# Altium PCB PCB2.PcbDoc
Units mil, origin at the board's own origin, x right, y up, seen from the top; angles counter-clockwise.
Board outline 3440 x 2640 mil, 2 copper layers (Top Layer, Bottom Layer); 109 components, 52 nets, 286 pads, 27 vias.
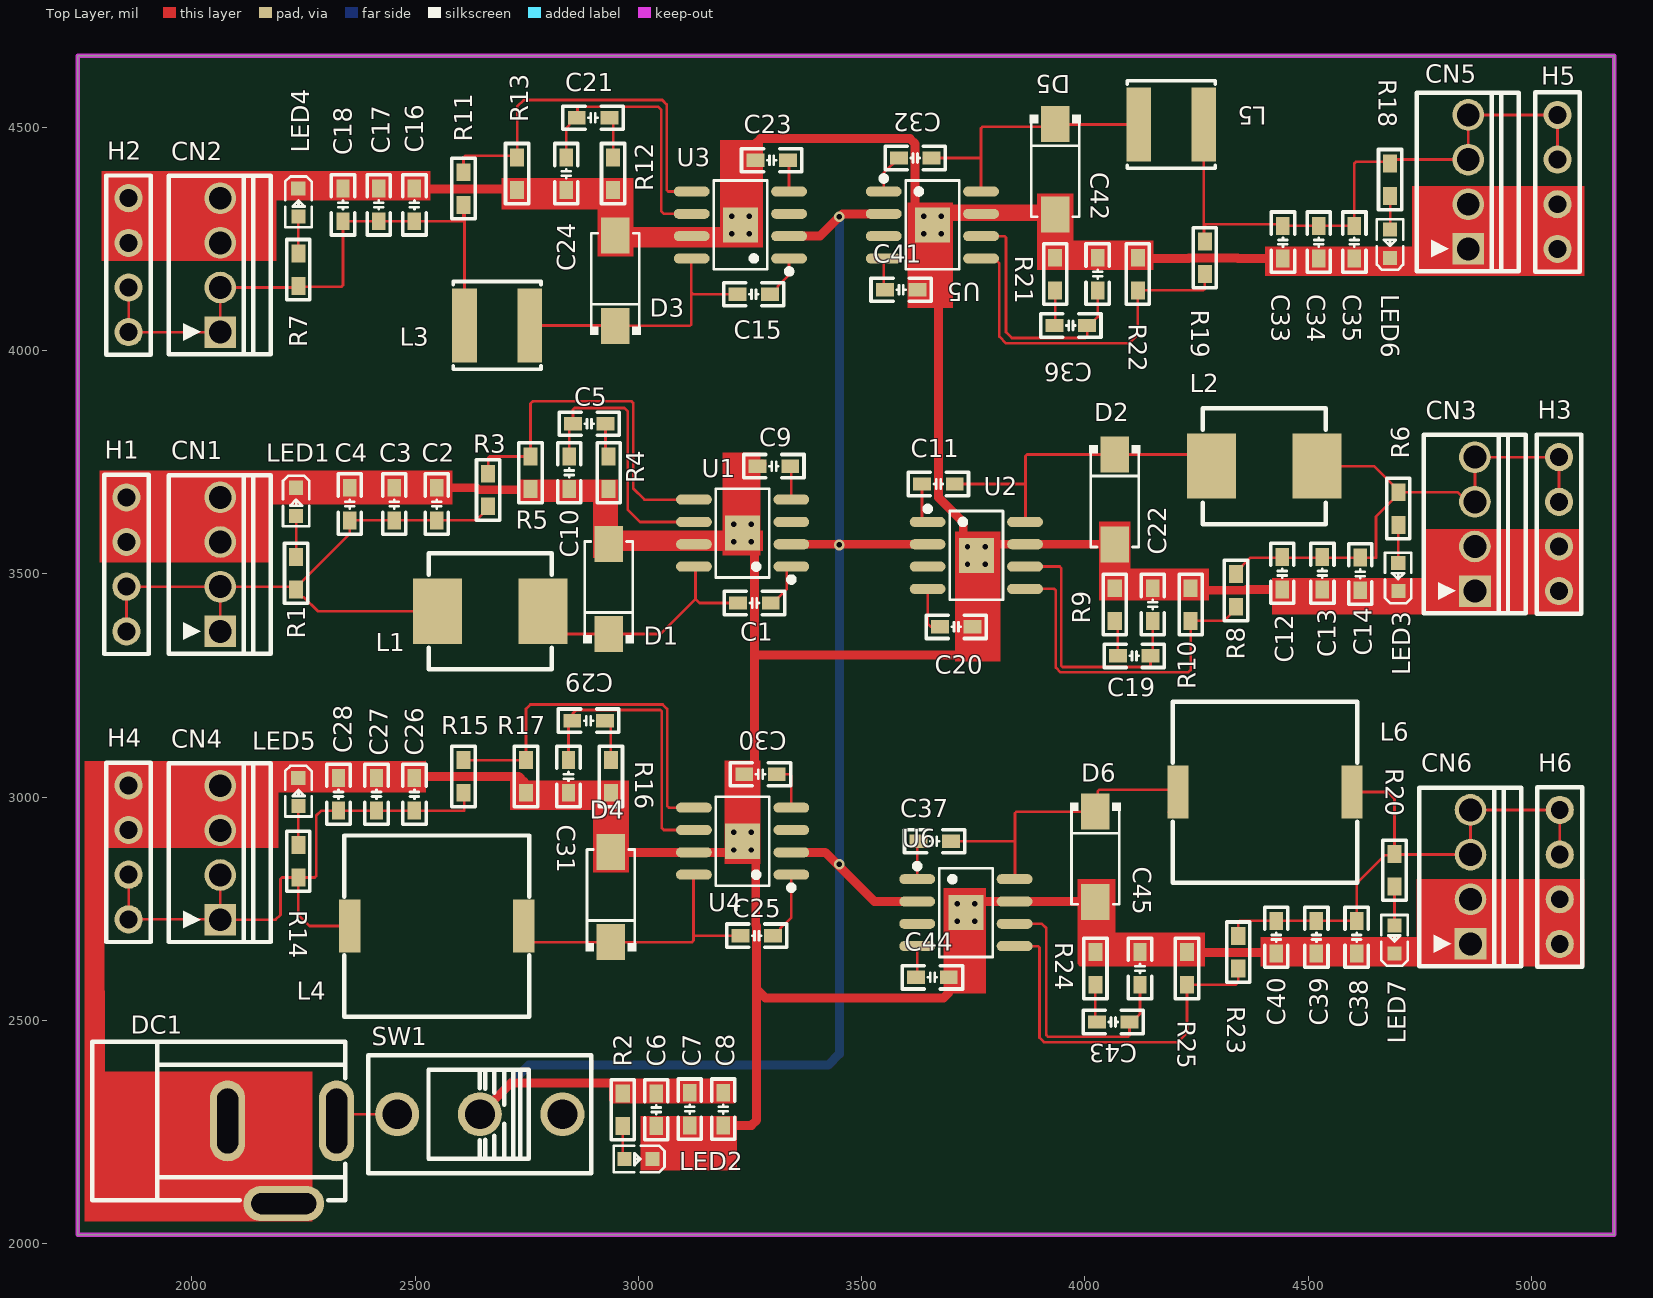
[diagram p0: Top Layer view]
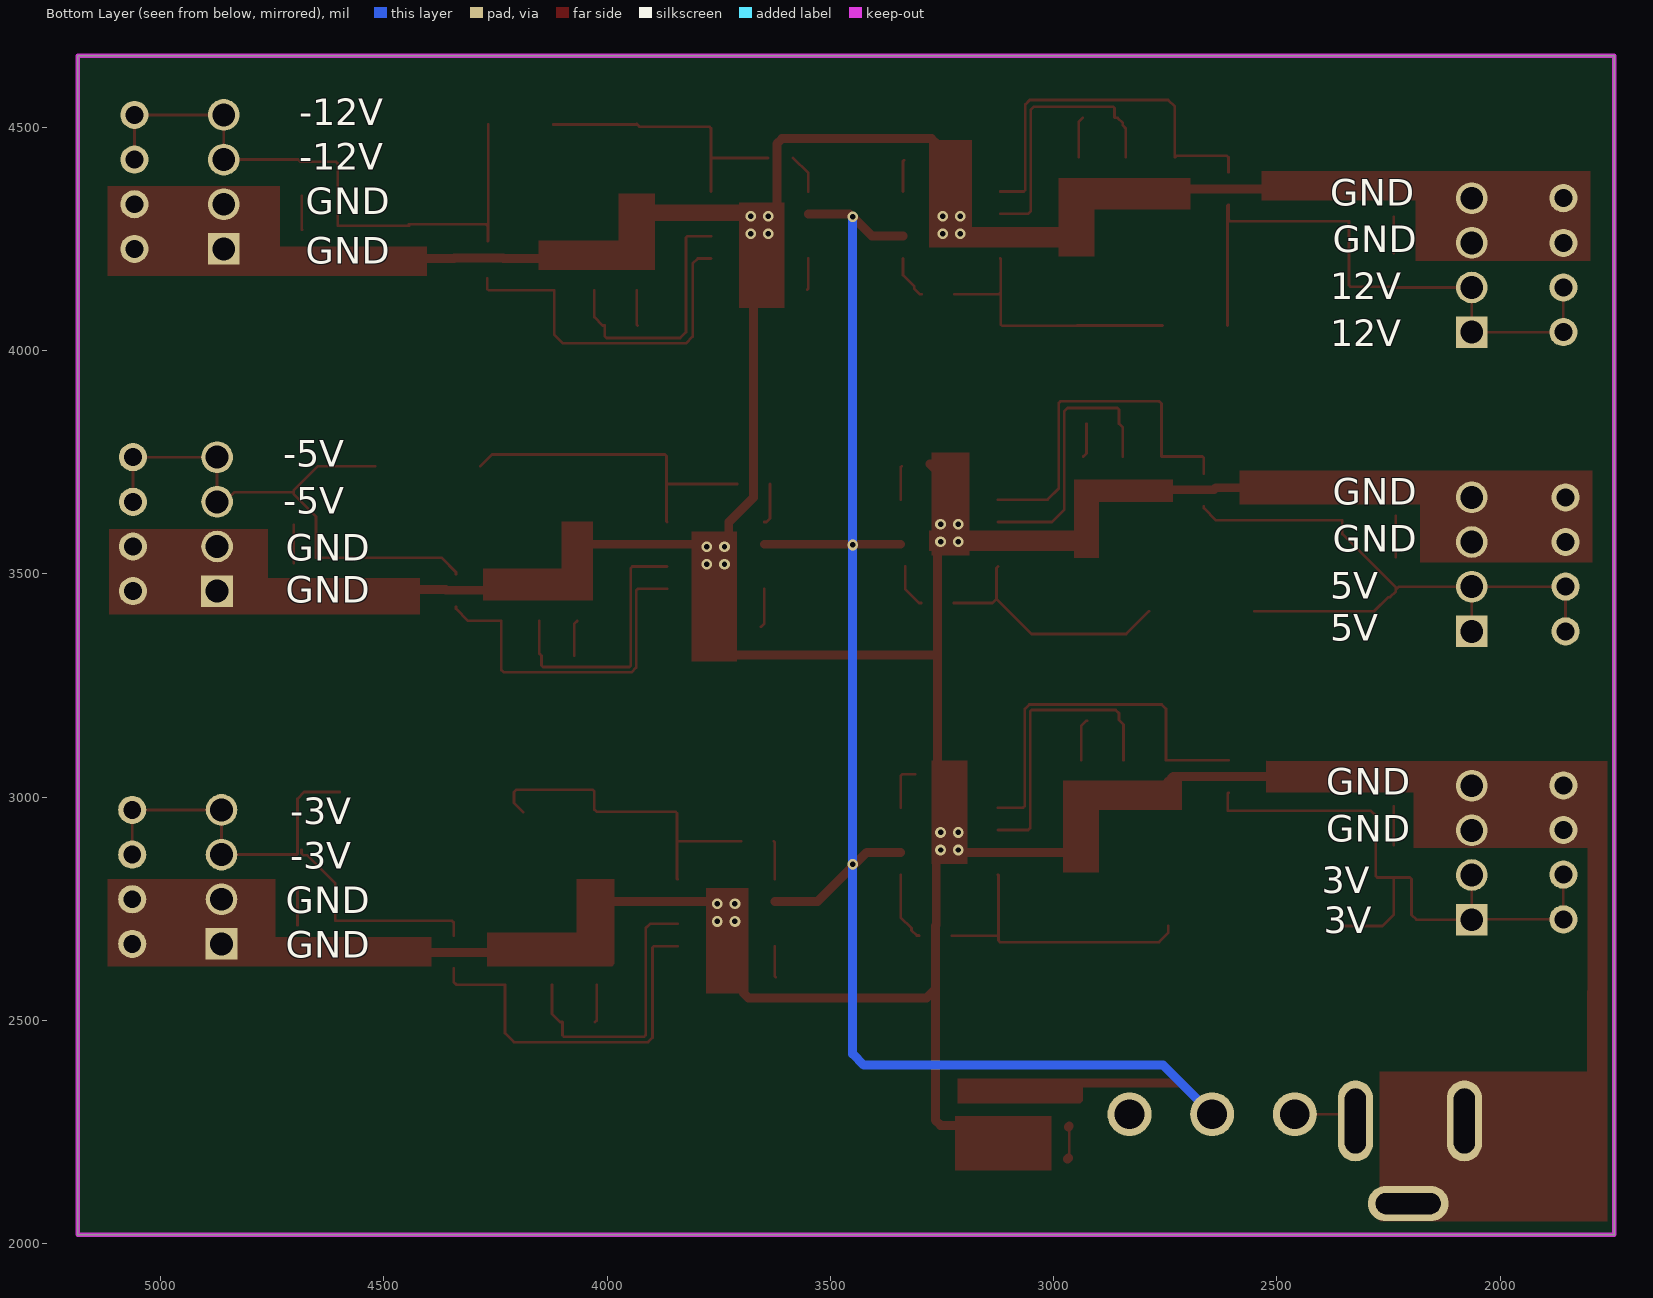
[diagram p1: Bottom Layer view, seen from below]
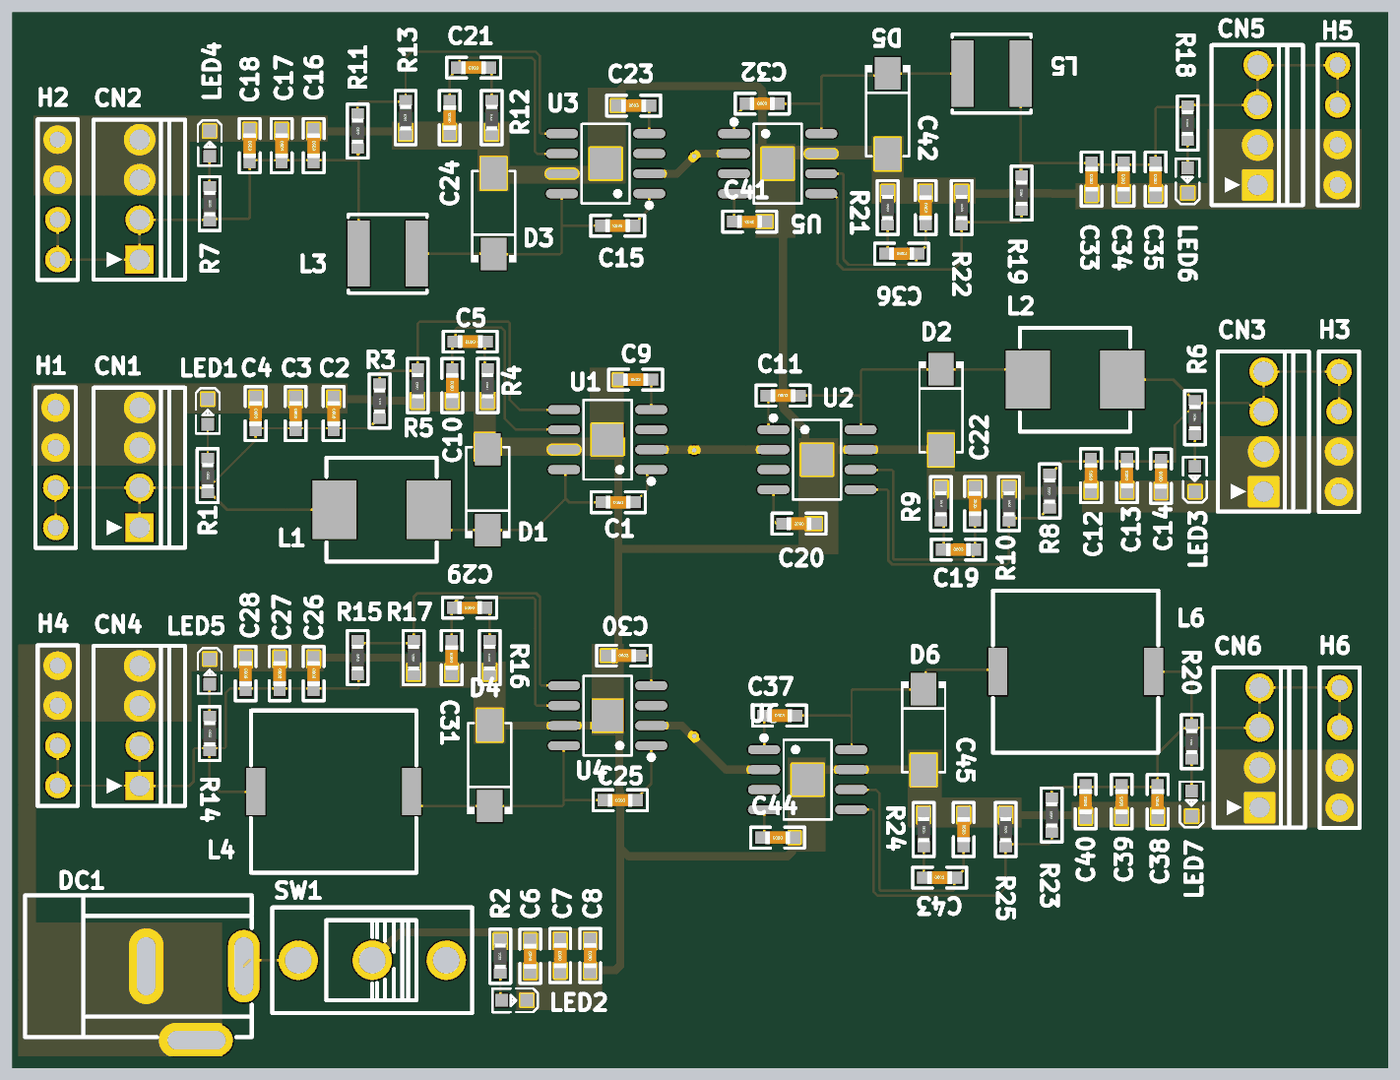
[diagram p2: 3D render of the assembled board from above, using the file's embedded part models]

## Layer stack, top to bottom
Top Solder: solder mask 0.4, Solder Resist, Dk 3.5
Top Layer: signal copper 1.4
Dielectric 1: dielectric 12.6, FR-4, Dk 4.8
Bottom Layer: signal copper 1.4
Bottom Solder: solder mask 0.4, Solder Resist, Dk 3.5

## Board outline
1745,2020 1745,4660 5185,4660 5185,2020

## Design rules (kind name [scope] priority, off if disabled: settings)
Clearance [All] p1: gap=6 ignorepadtopadclearanceinfootprint=FALSE except(0: Arc-Hole Track-Hole SMDPad-Hole THPad-Hole Via-Hole Fill-Hole Poly-Hole Region-Hole Text-Hole)
ComponentClearance [All] p1: gap=0 collisioncheckmode=3 verticalgap=0 showdistances=FALSE
HoleSize [All] p1: absolutevalues=TRUE maxlimit=150 minlimit=1 maxpercent=80.000 minpercent=20.000
MinimumSolderMaskSliver [All] p1: minsoldermaskwidth=0
NetAntennae [All] p1 off: netantennaetolerance=0
PolygonConnect [All] p1: connectstyle=Direct reliefconductorwidth=10 reliefentries=4 polygonreliefangle="90 Angle" airgapwidth=10
RoutingVias [All] p1: holewidth=12 width=24 viastyle="Through Hole" minholewidth=10 minwidth=20 maxholewidth=25 maxwidth=50
SilkToSilkClearance [All] p1: silktosilkclearance=0
SilkToSolderMaskClearance [IsPad] p1: minsilkscreentomaskgap=0 clearancetoexposedcopper=TRUE
SolderMaskExpansion [All] p1: expansion=4 istentingtop=FALSE
Width VCC [InNet('VIN')] p1: maxlimit=50 minlimit=6 preferedwidth=20
Width GND [InNet('VGND')] p2: maxlimit=50 minlimit=6 preferedwidth=20
Width Signal [All] p3: maxlimit=50 minlimit=6 preferedwidth=6
Width [All] p4: maxlimit=10 minlimit=10 preferedwidth=10
24 further rules are at their usual default settings.

## Components (designator, comment, footprint, x,y, rotation, side; value= is the part's Value field where it differs from the comment)
C1 "100nF" C0603_M 3260,3435 r180 top
C2 "47uF" C0603_M 2548.51,3656.5 r270 top
C3 "47uF" C0603_M 2453.51,3656.5 r270 top
C4 "10uF" C0603_M 2353.51,3656.5 r270 top
C5 "75pF" C0603_M 2890.01,3836.5 r180 top
C6 "10uF" C0603_M 3040,2300 r90 top
C7 "10uF" C0603_M 3115,2301.5 r90 top
C8 "10nF" C0603_M 3190,2301.5 r90 top
C9 "8.2nF" C0603_M 3303.51,3741.5 r0 top
C10 "0.275pF" C0603_M 2845.01,3726.5 r90 top
C11 "100nF" C0603_M 3671.89,3701.5 r0 top
C12 "47uF" C0603_M 4441.89,3501.5 r90 top
C13 "47uF" C0603_M 4531.89,3501.5 r90 top
C14 "10uF" C0603_M 4616.89,3500 r90 top
C15 "100nF" C0603_M 3258.51,4126.5 r180 top
C16 "47uF" C0603_M 2498.51,4326.5 r270 top
C17 "47uF" C0603_M 2418.51,4326.5 r270 top
C18 "10uF" C0603_M 2338.51,4326.5 r270 top
C19 "75pF" C0603_M 4110.39,3316.5 r0 top
C20 "8.2nF" C0603_M 3711.89,3381.5 r180 top
C21 "75pF" C0603_M 2898.51,4521.5 r180 top
C22 "0.275pF" C0603_M 4151.89,3431.5 r270 top
C23 "8.2nF" C0603_M 3298.51,4426.5 r0 top
C24 "0.275pF" C0603_M 2838.51,4396.5 r90 top
C25 "100nF" C0603_M 3265,2690 r180 top
C26 "47uF" C0603_M 2498.51,3006.5 r270 top
C27 "47uF" C0603_M 2413.51,3006.5 r270 top
C28 "10uF" C0603_M 2328.51,3006.5 r270 top
C29 "75pF" C0603_M 2888.51,3171.5 r180 top
C30 "8.2nF" C0603_M 3273.51,3051.5 r0 top
C31 "0.275pF" C0603_M 2843.51,3046.5 r90 top
C32 "100nF" C0603_M 3620.01,4431.5 r0 top
C33 "47uF" C0603_M 4443.51,4243 r90 top
C34 "47uF" C0603_M 4523.51,4243 r90 top
C35 "10uF" C0603_M 4603.51,4243 r90 top
C36 "75pF" C0603_M 3968.51,4056.5 r0 top
C37 "100nF" C0603_M 3663.51,2901.5 r0 top
C38 "47uF" C0603_M 4608.51,2686.5 r90 top
C39 "47uF" C0603_M 4518.51,2686.5 r90 top
C40 "10uF" C0603_M 4428.51,2686.5 r90 top
C41 "8.2nF" C0603_M 3588.51,4136.5 r180 top
C42 "0.275pF" C0603_M 4028.51,4171.5 r270 top
C43 "75pF" C0603_M 4063.51,2496.5 r0 top
C44 "8.2nF" C0603_M 3658.51,2596.5 r180 top
C45 "0.275pF" C0603_M 4123.51,2616.5 r270 top
CN1 "22272041" CONN-TH_22272041 2063.51,3521.5 r270 top
CN2 "22272041" CONN-TH_22272041 2063.51,4191.5 r270 top
CN3 "22272041" CONN-TH_22272041 4873.51,3611.5 r270 top
CN4 "22272041" CONN-TH_22272041 2063.51,2875.71 r270 top
CN5 "22272041" CONN-TH_22272041 4858.51,4378 r270 top
CN6 "22272041" CONN-TH_22272041 4863.51,2821.5 r270 top
D1 "SS54_C123946" SMA_L4.4-W2.8-LS5.4-RD 2933.51,3466.5 r90 top
D2 "SS54_C123946" SMA_L4.4-W2.8-LS5.4-RD 4066.89,3666.5 r270 top
D3 "SS54_C123946" SMA_L4.4-W2.8-LS5.4-RD 2948.51,4156.5 r90 top
D4 "SS54_C123946" SMA_L4.4-W2.8-LS5.4-RD 2938.51,2776.5 r90 top
D5 "SS54_C123946" SMA_L4.4-W2.8-LS5.4-RD 3933.51,4406.5 r270 top
D6 "SS54_C123946" SMA_L4.4-W2.8-LS5.4-RD 4023.51,2866.5 r270 top
DC1 "DC005_C431533" DC-IN-TH_DC005 2202.04,2182.47 r0 top
H1 "GP26-2520WV-4P" HDR-TH_4P-P2.54-V-F-R1-C4 1853.51,3521.5 r90 top
H2 "GP26-2520WV-4P" HDR-TH_4P-P2.54-V-F-R1-C4 1858.51,4191.5 r90 top
H3 "GP26-2520WV-4P" HDR-TH_4P-P2.54-V-F-R1-C4 5061.89,3611.5 r90 top
H4 "GP26-2520WV-4P" HDR-TH_4P-P2.54-V-F-R1-C4 1858.51,2876.5 r90 top
H5 "GP26-2520WV-4P" HDR-TH_4P-P2.54-V-F-R1-C4 5058.51,4378 r90 top
H6 "GP26-2520WV-4P" HDR-TH_4P-P2.54-V-F-R1-C4 5063.51,2821.5 r90 top
L1 "8.2uH" IND-SMD_L7.0-W6.6 2668.51,3416.5 r180 top
L2 "8.2uH" IND-SMD_L7.0-W6.6 4401.89,3741.5 r0 top
L3 "15uH" IND-SMD_L5.0-W5.0_SWPA5040S 2683.51,4056.5 r180 top
L4 "6.8uH" IND-SMD_L10.5-W10.3 2548.51,2711.5 r180 top
L5 "15uH" IND-SMD_L5.0-W5.0_SWPA5040S 4193.51,4506.5 r0 top
L6 "6.8uH" IND-SMD_L10.5-W10.3 4403.51,3011.5 r0 top
LED1 "FC-1608UGK-520D" LED0603-RD 2233.51,3661.5 r270 top
LED2 "FC-1608UGK-520D" LED0603-RD 3000,2190 r180 top
LED3 "FC-1608UGK-520D" LED0603-RD 4701.89,3493 r90 top
LED4 "FC-1608UGK-520D" LED0603-RD 2238.51,4331.5 r270 top
LED5 "FC-1608UGK-520D" LED0603-RD 2238.51,3011.5 r270 top
LED6 "FC-1608UGK-520D" LED0603-RD 4683.51,4239.5 r90 top
LED7 "FC-1608UGK-520D" LED0603-RD 4693.51,2681.5 r90 top
R1 "10K" R0603_M 2233.51,3501.5 r270 top
R2 "10K" R0603_M 2965,2300 r90 top
R3 "30.1K" R0603_M 2663.51,3688 r270 top
R4 "37.4K" R0603_M 2933.51,3726.5 r90 top
R5 "2K" R0603_M 2758.51,3726.5 r90 top
R6 "10K" R0603_M 4701.89,3646.5 r90 top
R7 "10K" R0603_M 2238.51,4181.5 r270 top
R8 "30.1K" R0603_M 4338.51,3463 r90 top
R9 "37.4K" R0603_M 4066.89,3431.5 r270 top
R10 "2K" R0603_M 4236.89,3431.5 r270 top
R11 "30.1K" R0603_M 2608.51,4363 r270 top
R12 "37.4K" R0603_M 2943.51,4396.5 r90 top
R13 "2K" R0603_M 2728.51,4396.5 r90 top
R14 "10K" R0603_M 2238.51,2856.5 r270 top
R15 "30.1K" R0603_M 2608.51,3046.5 r270 top
R16 "37.4K" R0603_M 2938.51,3046.5 r90 top
R17 "2K" R0603_M 2748.51,3046.5 r90 top
R18 "10K" R0603_M 4683.51,4383 r90 top
R19 "30.1K" R0603_M 4268.51,4208 r90 top
R20 "10K" R0603_M 4693.51,2836.5 r90 top
R21 "37.4K" R0603_M 3933.51,4171.5 r270 top
R22 "2K" R0603_M 4118.51,4171.5 r270 top
R23 "30.1K" R0603_M 4343.51,2653 r90 top
R24 "37.4K" R0603_M 4023.51,2616.5 r270 top
R25 "2K" R0603_M 4228.51,2616.5 r270 top
SW1 "SS-12D10L4" SW-TH_SS-12D10L3 2645,2290 r180 top
U1 "TPS54531DDAR" SOIC-8_L5.0-W4.0-P1.27-LS6.0-BL-EP 3233.51,3591.5 r90 top
U2 "TPS54531DDAR" SOIC-8_L5.0-W4.0-P1.27-LS6.0-BL-EP 3756.89,3541.5 r270 top
U3 "TPS54531DDAR" SOIC-8_L5.0-W4.0-P1.27-LS6.0-BL-EP 3228.51,4281.5 r90 top
U4 "TPS54531DDAR" SOIC-8_L5.0-W4.0-P1.27-LS6.0-BL-EP 3233.51,2901.5 r90 top
U5 "TPS54531DDAR" SOIC-8_L5.0-W4.0-P1.27-LS6.0-BL-EP 3658.51,4281.5 r270 top
U6 "TPS54531DDAR" SOIC-8_L5.0-W4.0-P1.27-LS6.0-BL-EP 3733.51,2741.5 r270 top

## Footprints (in the part's own frame and the unit in brackets; to place one, negate y for a bottom-side part, rotate by r counter-clockwise, add the part's x,y. Pads: shape width x height; smd on the part's side, far side on the other; paste and mask are expansions set on the pad)
C0603_M [mil] "无极性贴片电容"
  rect 40x30 smd: 1(-36.5,0) 2(36.5,0)
  silkscreen extent -68,-26 68,26, body extent -31,-16 32,16, height 33
CONN-TH_22272041 [mm]
  rect 1.8x1.8 hole 1.3: 1(3.81,0)
  round 1.8 hole 1.3: 2(1.27,0) 3(-1.27,0) 4(-3.81,0)
  silkscreen extent -5.08,-2.92 5.08,2.88
DC-IN-TH_DC005 [mm]
  oval 2x4.6 hole 1.2 slot 3.7 at 90 deg: 1(3.1,2.35) 2(-3.1,2.35)
  oval 4.6x2 hole 1.2 slot 3.7 at 0 deg: 3(0.1,-2.35)
  silkscreen extent -10.8,-2.15 3.6,6.85
HDR-TH_4P-P2.54-V-F-R1-C4 [mm]
  round 1.6 hole 1.02: 1(-3.81,0) 2(-1.27,0) 3(1.27,0) 4(3.81,0)
  silkscreen extent -5.1,-1.27 5.1,1.27
IND-SMD_L5.0-W5.0_SWPA5040S [mm]
  rect 1.4x4.2 smd: 1(-1.85,0) 2(1.85,0)
  silkscreen extent -2.5,-2.5 2.5,2.5
IND-SMD_L7.0-W6.6 [mm]
  rect 2.8x3.7 smd: 1(-3,0) 2(3,0)
  silkscreen extent -3.5,-3.3 3.5,3.3
IND-SMD_L10.5-W10.3 [mm]
  rect 1.2x3 smd: 1(-4.95,0) 2(4.95,0)
  silkscreen extent -5.25,-5.15 5.25,5.15
LED0603-RD [mm]
  rect 0.8x0.8 smd: 1(-0.799,-0.003) 2(0.799,0.004)
  silkscreen extent -1.49,-0.75 1.39,0.76
R0603_M [mil] "1/10W贴片电阻"
  rect 40x31.5 smd: 1(-36.5,0) 2(36.5,0)
  silkscreen extent -68,-26 68,26, body extent -31,-16 32,16, height 16
SMA_L4.4-W2.8-LS5.4-RD [mm]
  rect 2.046x1.62 smd: 1(-2.566,0) 2(2.565,0)
  silkscreen extent -3.08,-1.44 2.7,1.44
SOIC-8_L5.0-W4.0-P1.27-LS6.0-BL-EP [mm]
  oval 0.574x2.038 smd: 1(-1.905,-2.769) 2(-0.635,-2.769) 3(0.635,-2.769) 4(1.905,-2.769) 5(1.905,2.769) 6(0.635,2.769) 7(-0.635,2.769) 8(-1.905,2.769)
  rect 2x2 smd: 9(0,0)
  silkscreen extent -2.79,-2.92 2.53,1.52
SW-TH_SS-12D10L3 [mm]
  round 2.5 hole 1.7: 1(-4.7,0) 2(0,0) 3(4.7,0)
  silkscreen extent -6.35,-3.35 6.35,3.35

## Part data
C1 C2 C3 C4 C5 C6 C7 C8 C9 C10 C11 C12 C13 C14 C15 C16 C17 C18 C19 C20 C21 C22 C23 C24 C25 C26 C27 C28 C29 C30 C31 C32 C33 C34 C35 C36 C37 C38 C39 C40 C41 C42 C43 C44 C45: library part C, "贴片电容", BOM名称=无极性贴片电容, 联系卖家，免费查找封装=唯一出售店铺网址https://shop463601444.taobao.com
CN1 CN2 CN3 CN4 CN5 CN6: BOM_JLCPCB Part Class="Extended Part", BOM_Manufacturer=MOLEX, BOM_Manufacturer Part=22272041, BOM_Supplier=LCSC, BOM_Supplier Part=C504991, Contributor=LCSC, JLCPCB Part Class="Extended Part", spicePre=C, spiceSymbolName=22272041
D1 D2 D3 D4 D5 D6: BOM_JLCPCB Part Class="Extended Part", BOM_Manufacturer=Jingdao, BOM_Manufacturer Part=SS54, BOM_Supplier=LCSC, BOM_Supplier Part=C123946, Contributor=LCSC, JLCPCB Part Class="Extended Part", spicePre=D, spiceSymbolName=SS54_C123946
DC1: BOM_Manufacturer="SHOU HAN", BOM_Manufacturer Part=DC005, JLCPCB Part Class="Extended Part", BOM_Supplier=LCSC, BOM_Supplier Part=C431533, Contributor=LCSC, spicePre=D, spiceSymbolName=DC005_C431533
H1 H2 H3 H4 H5 H6: BOM_Manufacturer=GEPU(歌普), JLCPCB Part Class="Extended Part", BOM_Manufacturer Part=GP26-2520WV-4P, BOM_Supplier=LCSC, BOM_Supplier Part=C2681739, Contributor=LCSC, spicePre=H, spiceSymbolName=GP26-2520WV-4P
L1 L2 L3 L4 L5 L6: library part L-AL, "色环电感", BOM名称=色环电感, 封装库来自淘宝卖家ID：黄晶宝石=其他店铺购入均为盗版假冒封装库，请立即申请退款, 联系卖家，免费查找封装=唯一出售店铺网址https://shop463601444.taobao.com
LED1 LED2 LED3 LED4 LED5 LED6 LED7: BOM_Manufacturer=NATIONSTAR, BOM_Manufacturer Part=FC-1608UGK-520D, BOM_Supplier=LCSC, BOM_Supplier Part=C87326, spicePre=L, spiceSymbolName=FC-1608UGK-520D
R1 R2 R3 R4 R5 R6 R7 R8 R9 R10 R11 R12 R13 R14 R15 R16 R17 R18 R19 R20 R21 R22 R23 R24 R25: library part R, "贴片电阻", BOM名称=贴片电阻, 封装库来自淘宝卖家ID：黄晶宝石=其他店铺购入均为盗版假冒封装库，请立即申请退款, 联系卖家，免费查找封装=唯一出售店铺网址https://shop463601444.taobao.com
SW1: BOM_Manufacturer="XKB Connectivity", JLCPCB Part Class="Extended Part", BOM_Manufacturer Part=SS-12D10L4, BOM_Supplier=LCSC, BOM_Supplier Part=C843364, Contributor=LCSC, spicePre=S, spiceSymbolName=SS-12D10L4
U1 U2 U3 U4 U5 U6: BOM_JLCPCB Part Class="Extended Part", BOM_Manufacturer=TI, BOM_Manufacturer Part=TPS54531DDAR, BOM_Supplier=LCSC, BOM_Supplier Part=C50605, JLCPCB Part Class="Extended Part", spicePre=U, spiceSymbolName=TPS54531DDAR

## Via types
v1: diameter 24, hole 12, Top Layer to Bottom Layer, 27 vias

## Nets (pads, with @x,y where several pads share a name; then routed paths per layer and width w, separated by ;. In a path a pad name is that pad's centre, name@x,y a point inside that pad or via, vN(x,y) a via of type N, cw(c..) or ccw(c..) an arc to the next point about the centre after c; other vN are vias at no path point)
NetC1_1: C1.1 U1.1 | length 99.4
  Top Layer w6: C1.1 3301.5,3435 3332.52,3466.02 U1.1@3332.52,3516.5
NetC1_2: C1.2 D1.1 L1.1 U1.8 | length 568.2
  Top Layer w6: L1.1 2837.62,3365.49 D1.1 3049.47,3365.49 3127.98,3444 ; U1.8 3127.98,3513.01 3127.98,3444 ; C1.2 3136.98,3435 3127.98,3444
NetC2_2: C2.2 C3.2 C4.2 CN1.1 CN1.2 H1.1 H1.2 L1.2 R1.2 R3.2 | length 1493.8
  Top Layer w6: H1.1 H1.2 CN1.2 ; CN1.1@2092.8,3400.79 CN1.1 CN1.2 ; L1.2 2282.01,3416.5 2250.51,3448 2246.26,3448 2233.51,3460.75 R1.2 ; R3.2 2663.51,3647.25 2636.26,3620 C2.2 C3.2 C4.2 2353.51,3589.25 2233.51,3469.25 R1.2 ; CN1.2 2227.01,3471.5 R1.2
NetC5_1: C5.1 R4.2 | length 76.4
  Top Layer w6: C5.1 2926.51,3770 R4.2
NetC5_2: C5.2 C10.2 U1.6 | length 615.4
  Top Layer w6: C10.2 2845.01,3828 C5.2 2853.51,3867.99 2857.02,3871.5 2968.51,3871.5 2976.51,3863.5 2976.51,3643.5 3003.51,3616.5 U1.6
NetC9_2: C9.2 U1.4 | length 76
  Top Layer w6: C9.2 3342.52,3738.98 U1.4
NetC11_1: C11.1 U2.1 | length 93
  Top Layer w6: C11.1 3635.39,3624.17 3643.06,3616.5 U2.1
NetC11_2: C11.2 D2.1 L2.1 U2.8 | length 737
  Top Layer w6: C11.2 3863.38,3701.5 3866.89,3697.99 ; U2.8 3866.89,3617.48 3866.89,3697.99 ; L2.1 4257.78,3767.51 D2.1 3870.41,3767.51 3866.89,3763.99 3866.89,3697.99
NetC12_2: C12.2 C13.2 C14.2 CN3.3 CN3.4 H3.3 H3.4 L2.2 R6.2 R8.2 | length 1275.9
  Top Layer w6: R8.2 4338.51,3503.75 4371.26,3536.5 C14.2 4651.89,3536.5 4651.89,3628.75 4701.89,3678.75 R6.2 ; L2.2 4647.65,3741.5 4701.89,3687.25 R6.2 ; H3.3 H3.4 CN3.4 CN3.3 4855.95,3661.5 4834.45,3683 R6.2
NetC15_1: C15.1 U3.1 | length 100.5
  Top Layer w6: C15.1 3300.01,4126.5 3312.01,4138.5 3312.01,4143.5 3337.52,4169.02 U3.1
NetC15_2: C15.2 D3.1 L3.1 U3.8 | length 616.9
  Top Layer w6: L3.1 2947.51,4056.49 D3.1 3114.99,4055.49 3118.51,4059.01 3118.51,4130.01 ; U3.8 3118.51,4205.52 3118.51,4130.01 ; C15.2 3122.02,4126.5 3118.51,4130.01
NetC16_2: C16.2 C17.2 C18.2 CN2.1 CN2.2 H2.1 H2.2 L3.2 R7.2 R11.2 | length 1402.2
  Top Layer w6: H2.2 H2.1 CN2.1 CN2.2 2235.01,4141.5 R7.2 2240.22,4143.29 2334.99,4143.29 2338.51,4146.8 C18.2 C17.2 C16.2 2604.99,4290 2608.51,4293.51 R11.2 2610.67,4324.34 L3.2
NetC19_1: C19.1 R9.2 | length 81.4
  Top Layer w6: R9.2 4073.89,3388 C19.1
NetC19_2: C19.2 C22.2 U2.6 | length 605.4
  Top Layer w6: U2.6 3943.38,3516.5 3946.89,3512.99 3946.89,3295.01 3950.41,3291.5 4143.38,3291.5 4146.89,3295.01 C19.2 4151.89,3321.5 C22.2
NetC20_2: C20.2 U2.4 | length 88.1
  Top Layer w6: U2.4 3647.88,3389.02 C20.2@3655.39,3381.5
NetC21_1: C21.1 R12.2 | length 92
  Top Layer w6: C21.1 2943.51,4513 R12.2
NetC21_2: C21.2 C24.2 U3.6 | length 612.8
  Top Layer w6: C24.2 2838.51,4498 2845.01,4504.5 2845.01,4509.5 2857.01,4521.5 C21.2 2863.51,4523 2863.51,4542.99 2867.02,4546.5 3043.51,4546.5 3051.51,4538.5 3051.51,4312.01 3057.02,4306.5 U3.6
NetC23_2: C23.2 U3.4 | length 71
  Top Layer w6: C23.2 3337.52,4423.98 U3.4
NetC25_1: C25.1 U4.1 | length 157.9
  Top Layer w6: C25.1@3302.52,2691.02 C25.1 3306.5,2690 3318.5,2702 3318.5,2707 3342.52,2731.02 U4.1
NetC25_2: C25.2 D4.1 L4.1 U4.8 | length 658.4
  Top Layer w6: L4.1 2743.39,2696.12 2764.01,2675.49 D4.1 3119.99,2675.49 3123.51,2679.01 3123.51,2690 ; U4.8 3123.51,2825.52 3123.51,2690 ; C25.2 3123.51,2690
NetC26_2: C26.2 C27.2 C28.2 CN4.1 CN4.2 H4.1 H4.2 L4.2 R14.2 R15.2 | length 1429.6
  Top Layer w6: H4.2 H4.1 2062.72,2726.5 CN4.1 ; CN4.2 CN4.1 ; L4.2 2263.51,2711.5 2238.51,2736.5 R14.2 ; R15.2 2610.4,3008.1 2610.4,2969.65 2610.05,2970 C26.2 C27.2 C28.2 2290.01,2970 2278.51,2958.5 2278.51,2823.51 2274.99,2820 R14.2 ; CN4.1 2187.72,2725.71 2198.51,2736.5 2198.51,2816.49 2202.02,2820 R14.2
NetC29_1: C29.1 R16.2 | length 95
  Top Layer w6: C29.1 2926.51,3171.5 2938.51,3159.5 R16.2
NetC29_2: C29.2 C31.2 U4.6 | length 647.5
  Top Layer w6: C31.2 2843.51,3163 C29.2 2853.51,3173 2853.51,3187.99 2861.02,3195.5 3048.98,3195.5 3052.49,3191.99 3052.49,2931.03 3057.02,2926.5 U4.6
NetC30_2: C30.2 U4.4 | length 105.2
  Top Layer w6: C30.2 3338.51,3051.5 3342.52,3047.48 U4.4
NetC32_1: C32.1 U5.1 | length 89.1
  Top Layer w6: U5.1 3549.49,4397.48 C32.1
NetC32_2: C32.2 D5.1 L5.1 U5.8 | length 628.7
  Top Layer w6: C32.2@3639.51,4431.5 3763.51,4431.5 3767.52,4427.48 ; U5.8 3767.52,4427.48 ; L5.1 3934.51,4506.51 D5.1 3927.5,4501.5 3771.04,4501.5 3767.52,4497.99 3767.52,4427.48
NetC33_2: C33.2 C34.2 C35.2 CN5.3 CN5.4 H5.3 H5.4 L5.2 R18.2 R19.2 | length 1434.6
  Top Layer w6: L5.2 4266.34,4246.66 4267.26,4245.75 4267.26,4279.49 4270.77,4283 4443.51,4283 C33.2 C34.2 C35.2 4603.51,4419.49 4607.02,4423 4687.01,4423 4692.01,4428 CN5.3 CN5.4 H5.4 H5.3
NetC36_1: C36.1 R21.2 | length 79.1
  Top Layer w6: C36.1 3933.51,4058 R21.2
NetC36_2: C36.2 C42.2 U5.6 | length 572.9
  Top Layer w6: U5.6 3819.99,4256.5 3823.51,4252.99 3823.51,4041.5 3836.51,4028.5 4001.49,4028.5 4005.01,4032.01 C36.2 4010.01,4056.5 4028.51,4075 C42.2
NetC37_1: C37.1 U6.1 | length 86
  Top Layer w6: U6.1 3624.49,2898.98 C37.1
NetC37_2: C37.2 D6.1 L6.1 U6.8 | length 759
  Top Layer w6: C37.2 3839.99,2901.5 3843.51,2897.99 ; U6.8 3843.51,2817.48 3843.51,2897.99 ; L6.1@4188,2966.5 4208.63,2987.12 L6.1 4203.63,3016.5 4032.02,3016.5 4028.51,3012.99 4028.51,2972.5 D6.1 3847.02,2967.51 3843.51,2963.99 3843.51,2897.99
NetC38_2: C38.2 C39.2 C40.2 CN6.3 CN6.4 H6.3 H6.4 L6.2 R20.2 R23.2 | length 1287.7
  Top Layer w6: R23.2 4343.51,2719.49 4347.02,2723 C40.2 C39.2 C38.2 4608.51,2806.5 4672.27,2870.27 4680.76,2870.27 4684.4,2873.91 R20.2@4684.4,2882.39 ; L6.2 4678.51,3011.5 4693.51,2996.5 R20.2 4695.01,2871.5 CN6.3 CN6.4 H6.4 H6.3
NetC41_2: C41.2 U5.4 | length 71
  Top Layer w6: U5.4 3549.49,4139.02 C41.2
NetC43_1: C43.1 R24.2 | length 84.9
  Top Layer w6: R24.2 4023.51,2500 C43.1
NetC43_2: C43.2 C45.2 U6.6 | length 629.7
  Top Layer w6: U6.6 3903.51,2716.5 3913.51,2706.5 3913.51,2467.01 3917.02,2463.5 4096.49,2463.5 4100.01,2467.01 C43.2 4105.01,2496.5 4123.51,2515 C45.2
NetC44_2: C44.2 U6.4 | length 71
  Top Layer w6: C44.2 3624.49,2598.98 U6.4
NetDC1_1: DC1.1 SW1.3 | length 142.1
  Top Layer w6: DC1.1 2339.08,2290 SW1.3
NetLED1_2: LED1.2 R1.1 | length 92.1
  Top Layer w6: R1.1 2233.65,3538.14 LED1.2
NetLED2_2: LED2.2 R2.1 | length 77.6
  Top Layer w6: R2.1 2965,2193.39 LED2.2@2966.76,2191.62
  Top Layer w20: R2.1 R2.1@2966.76,2261.74 ; LED2.2@2966.76,2191.62 LED2.2
NetLED3_2: LED3.2 R6.1 | length 85.6
  Top Layer w6: LED3.2 4701.89,3524.61 R6.1
NetLED4_2: LED4.2 R7.1 | length 82.1
  Top Layer w6: R7.1 2238.51,4299.89 LED4.2
NetLED5_2: LED5.2 R14.1 | length 87.1
  Top Layer w6: R14.1 2238.51,2979.89 LED5.2
NetLED6_2: LED6.2 R18.1 | length 75.6
  Top Layer w6: LED6.2 4683.51,4271.11 R18.1
NetLED7_2: LED7.2 R20.1 | length 87.1
  Top Layer w6: LED7.2 4693.51,2713.11 R20.1
NetR3_1: R3.1 R5.2 U1.5 | length 821.3
  Top Layer w6: R3.1 2663.51,3759.49 2667.02,3763 R5.2 2758.51,3881.5 2763.51,3886.5 2984.99,3886.5 2988.51,3882.99 2988.51,3691.5 3013.51,3666.5 U1.5
NetR8_1: R8.1 R10.2 U2.5 | length 779.2
  Top Layer w6: U2.5 3931.38,3466.5 3934.89,3462.99 3934.89,3290.04 3945.44,3279.5 4231.38,3279.5 4236.89,3285.01 R10.2 4311.26,3395 4338.51,3422.25 R8.1
NetR11_1: R11.1 R13.2 U3.5 | length 864.2
  Top Layer w6: R11.1 2608.51,4432.99 2612.02,4436.5 2725.01,4436.5 R13.2 2728.51,4546.5 2743.51,4561.5 3053.51,4561.5 3063.51,4551.5 3063.51,4360.01 3067.02,4356.5 U3.5
NetR15_1: R15.1 R17.2 U4.5 | length 857.7
  Top Layer w6: R15.1 R17.2 2748.51,3197.99 2758.02,3207.5 3054.48,3207.5 3064.49,3197.49 3064.49,2980.51 3068.51,2976.5 U4.5
NetR19_1: R19.1 R22.2 U5.5 | length 806.6
  Top Layer w6: U5.5 3796.94,4206.5 3808.51,4194.93 3808.51,4031.5 3823.51,4016.5 4098.51,4016.5 4118.51,4036.5 R22.2 4264.99,4135 4268.51,4138.51 R19.1@4268.51,4161.5
NetR23_1: R23.1 R25.2 U6.5 | length 857.5
  Top Layer w6: U6.5 3894.99,2666.5 3898.51,2662.99 3898.51,2461.5 3908.51,2451.5 4208.51,2451.5 4228.51,2471.5 R25.2 4337.01,2580 4343.51,2586.5 R23.1
VGND: C2.1 C3.1 C4.1 C6.1 C7.1 C8.1 C9.1 C10.1 C12.1 C13.1 C14.1 C16.1 C17.1 C18.1 C20.1 C22.1 C23.1 C24.1 C26.1 C27.1 C28.1 C30.1 C31.1 C33.1 C34.1 C35.1 C38.1 C39.1 C40.1 C41.1 C42.1 C44.1 C45.1 CN1.3 CN1.4 CN2.3 CN2.4 CN3.1 CN3.2 CN4.3 CN4.4 CN5.1 CN5.2 CN6.1 CN6.2 D1.2 D2.2 D3.2 D4.2 D5.2 D6.2 DC1.2 DC1.3 H1.3 H1.4 H2.3 H2.4 H3.1 H3.2 H4.3 H4.4 H5.1 H5.2 H6.1 H6.2 LED1.1 LED2.1 LED3.1 LED4.1 LED5.1 LED6.1 LED7.1 R4.1 R5.1 R9.1 R10.1 R12.1 R13.1 R16.1 R17.1 R21.1 R22.1 R24.1 R25.1 U1.7 U1.9 U2.7 U2.9 U3.7 U3.9 U4.7 U4.9 U5.7 U5.9 U6.7 U6.9 | length 6060.6
  Top Layer w20: 1813.32,2924.72 1856.72,2924.72 H4.3 H4.4 ; LED1.1 LED1.1@2236.9,3696.5 ; C26.1 2502.01,3046.5 2731.79,3046.5 2743.51,3034.78 2743.51,3015 R17.1 ; C16.1 2499.01,4362.5 2726.01,4362.5 R13.1 ; C2.1 2636.63,3693 2641.13,3688.5 2757.01,3688.5 R5.1 ; D4.2 2939.51,2876.5 U4.7 3208.51,2876.5 v1(3213.83,2881.82) v1(3253.2,2881.82) 3262.88,2872.14 3262.88,2713.25 3265,2711.13 3265,2276.72 3253.28,2265 C8.1 ; U1.9@3208.51,3566.5 v1(3213.83,3571.82) ; v1(3213.83,3611.19) U1.9@3216.89,3614.25 ; U3.9@3236.83,4310.87 3246.51,4301.19 v1(3248.2,4301.19) ; C30.1 C30.1@3242.01,3051.5 ; v1(3248.2,4261.82) U3.9@3257.88,4252.14 ; v1(3253.2,3571.82) 3262.88,3562.14 3260.01,3562.14 3260,3318.57 ; v1(3253.2,3611.19) U1.9@3262.88,3620.87 ; 3260,3075 3260,3318.57 ; C23.1 3262.01,4463.28 3273.72,4475 3608.29,4475 3620.01,4463.28 3620.01,4325.01 ; 3265.5,2569.5 3275.61,2559.39 3285,2550 3683.29,2550 3695.01,2561.72 C44.1 ; C9.1@3267.01,3736.5 C9.1@3277.01,3746.5 ; C41.1 3628.01,4136.5 C41.1@3633.01,4131.5 ; U5.9@3629.14,4310.86 v1(3638.82,4301.18) ; 3670,4115 3671.89,4113.11 3671.89,3671.5 3727.52,3615.87 3727.52,3570.86 v1(3737.2,3561.18) ; 3720,3318.57 3260,3318.57 ; 3723.83,3330.28 3723.83,3363.28 ; C20.1@3743.39,3381.5 C20.1 3765.18,3381.5 3776.89,3393.22 3776.89,3521.49 v1(3776.57,3521.81) ; v1(3753.19,2761.18) 3758.51,2766.5 U6.7 4022.51,2766.5 D6.2 ; v1(3776.57,3561.18) 3781.89,3566.5 U2.7 4065.89,3566.5 D2.2 ; R22.1 4120.01,4206.5 4232.54,4206.5 4233.54,4207.5 4341.82,4207.5 4342.82,4206.5 C33.1 ; R25.1 4229.01,2652.5 4426.01,2652.5 C40.1 ; R10.1@4246.89,3458 4242.64,3458 4236.89,3463.75 R10.1 4241.39,3463.5 4360.88,3463.5 4362.38,3465 C12.1
  other v1: 3713.82,2721.81 3753.19,2721.81 3713.82,2761.18 3213.83,2921.19 3253.2,2921.19 3737.2,3521.81 3208.83,4261.82 3638.82,4261.81 3678.19,4261.81 3208.83,4301.19 3678.19,4301.18
VIN: C6.2 C7.2 C8.2 R2.2 SW1.2 U1.2 U2.2 U3.2 U4.2 U5.2 U6.2 | length 3955
  Top Layer w20: SW1.2@2650,2285 SW1.2 2715,2360 2945,2360 ; R2.2@2959.25,2330 2965,2335.75 R2.2 ; C6.2 C6.2@3042.5,2339 ; C8.2@3190,2333 C8.2 ; U3.2 3406.5,4256.5 v1(3450,4300) 3451.08,4300 3457.58,4306.5 U5.2 ; U4.2 3418.5,2876.5 3429.97,2865.03 3528.5,2766.5 U6.2 ; U1.2 U2.2
  Bottom Layer w20: SW1.2 2755,2400 3425,2400 3450,2425 v1(3450,2850) v1(3450,3565) v1(3450,4300)
pads on no net: SW1.1 U1.3 U2.3 U3.3 U4.3 U5.3 U6.3

## Keep-outs
Keep-Out Layer:
  the board outline again, w10

## Other copper
Top Layer:
  region net VGND: 5115,3600 5115,3410 4420,3410 4420,3490 4760,3490 4760,3600
  region net VIN: 3215,2315 3215,2370 2935,2370 2935,2320 2940,2315
  region net VGND: 3005,2285 3220,2285 3220,2165 3005,2165
  region net VGND: 2270,2385 2270,2050 1760,2050 1760,2385
  region net VGND: 1803.51,3080 1760,3080 1760,2055 1805,2055
  region net VGND: 3810,3305 3810,3595 3710,3595 3710,3305
  region net VGND: 4403.51,4233 4403.51,4168 5118.51,4168 5118.51,4368 4733.51,4368 4733.51,4233
  region net VGND: 3703.51,4331.5 3603.51,4331.5 3603.51,4096.5 3698.51,4096.5 3703.51,4096.5
  region net VGND: 3983.51,2816.5 3983.51,2626.5 3988.51,2621.5 4268.51,2621.5 4268.51,2696.5 4068.51,2696.5 4068.51,2816.5
  region net VGND: 3778.51,2796.5 3683.51,2796.5 3683.51,2561.5 3778.51,2561.5
  region net VGND: 3893.51,4351.5 3893.51,4181.5 4153.51,4181.5 4153.51,4246.5 3973.51,4246.5 3973.51,4351.5
  region net VGND: 3968.51,4291.5 3968.51,4326.5 3703.51,4326.5 3703.51,4291.5
  region net VGND: 4031.89,3616.5 4031.89,3441.5 4276.89,3441.5 4276.89,3511.5 4101.89,3511.5 4101.89,3616.5
  region net VGND: 4393.51,2621.5 5118.51,2621.5 5118.51,2811.5 5118.51,2816.5 4743.51,2816.5 4743.51,2686.5 4393.51,2686.5
  region net VGND: 3273.51,3541.5 3273.51,3771.5 3188.51,3771.5 3188.51,3541.5
  region net VGND: 2953.51,3596.5 3278.51,3596.5 3278.51,3551.5 2953.51,3551.5
  region net VGND: 2733.51,3711.5 2953.51,3711.5 2953.51,3536.5 2898.51,3536.5 2898.51,3661.5 2733.51,3661.5
  region net VGND: 2583.51,3731.5 1793.51,3731.5 1793.51,3526.5 2178.51,3526.5 2178.51,3656.5 2583.51,3656.5
  region net VGND: 2523.51,3011.5 2523.51,3081.5 1803.51,3080 1803.51,2886.5 2193.51,2886.5 2193.51,3011.5
  region net VGND: 3273.51,3081.5 3193.51,3081.5 3193.51,2851.5 3273.51,2851.5 3273.51,3026.5
  region net VGND: 2978.51,2831.5 2978.51,3036.5 2713.51,3036.5 2713.51,2971.5 2898.51,2971.5 2898.51,2831.5
  region net VGND: 2533.51,4336.5 2533.51,4401.5 1798.51,4401.5 1798.51,4201.5 2188.51,4201.5 2188.51,4336.5
  region net VGND: 2988.51,4211.5 2988.51,4386.5 2693.51,4386.5 2693.51,4316.5 2908.51,4316.5 2908.51,4211.5
  region net VGND: 3183.51,4231.5 3278.51,4231.5 3278.51,4471.5 3183.51,4471.5
  region net VGND: 2988.51,4276.5 3183.51,4276.5 3183.51,4231.5 2988.51,4231.5

## Silkscreen, mask and mechanical layers (free items; w line width, h text height)
Bottom Overlay:
  text "-12V" at 4690,4505 h60
  text "-12V" at 4690,4405 h60
  text "GND" at 2380,4325 h60
  text "GND" at 4675,4305 h60
  text "GND" at 2375,4220 h60
  text "GND" at 4675,4195 h60
  text "12V" at 2380,4115 h60
  text "12V" at 2380,4010 h60
  text "-5V" at 4725,3740 h60
  text "GND" at 2375,3655 h60
  text "-5V" at 4725,3635 h60
  text "GND" at 2375,3550 h60
  text "GND" at 4720,3530 h60
  text "5V" at 2380,3445 h60
  text "GND" at 4720,3435 h60
  text "5V" at 2380,3350 h60
  text "GND" at 2390,3005 h60
  text "-3V" at 4710,2940 h60
  text "GND" at 2390,2900 h60
  text "-3V" at 4710,2840 h60
  text "3V" at 2400,2785 h60
  text "GND" at 4720,2740 h60
  text "3V" at 2395,2695 h60
  text "GND" at 4720,2640 h60